# EAGLE board od-aws (EAGLE 9.6.2)
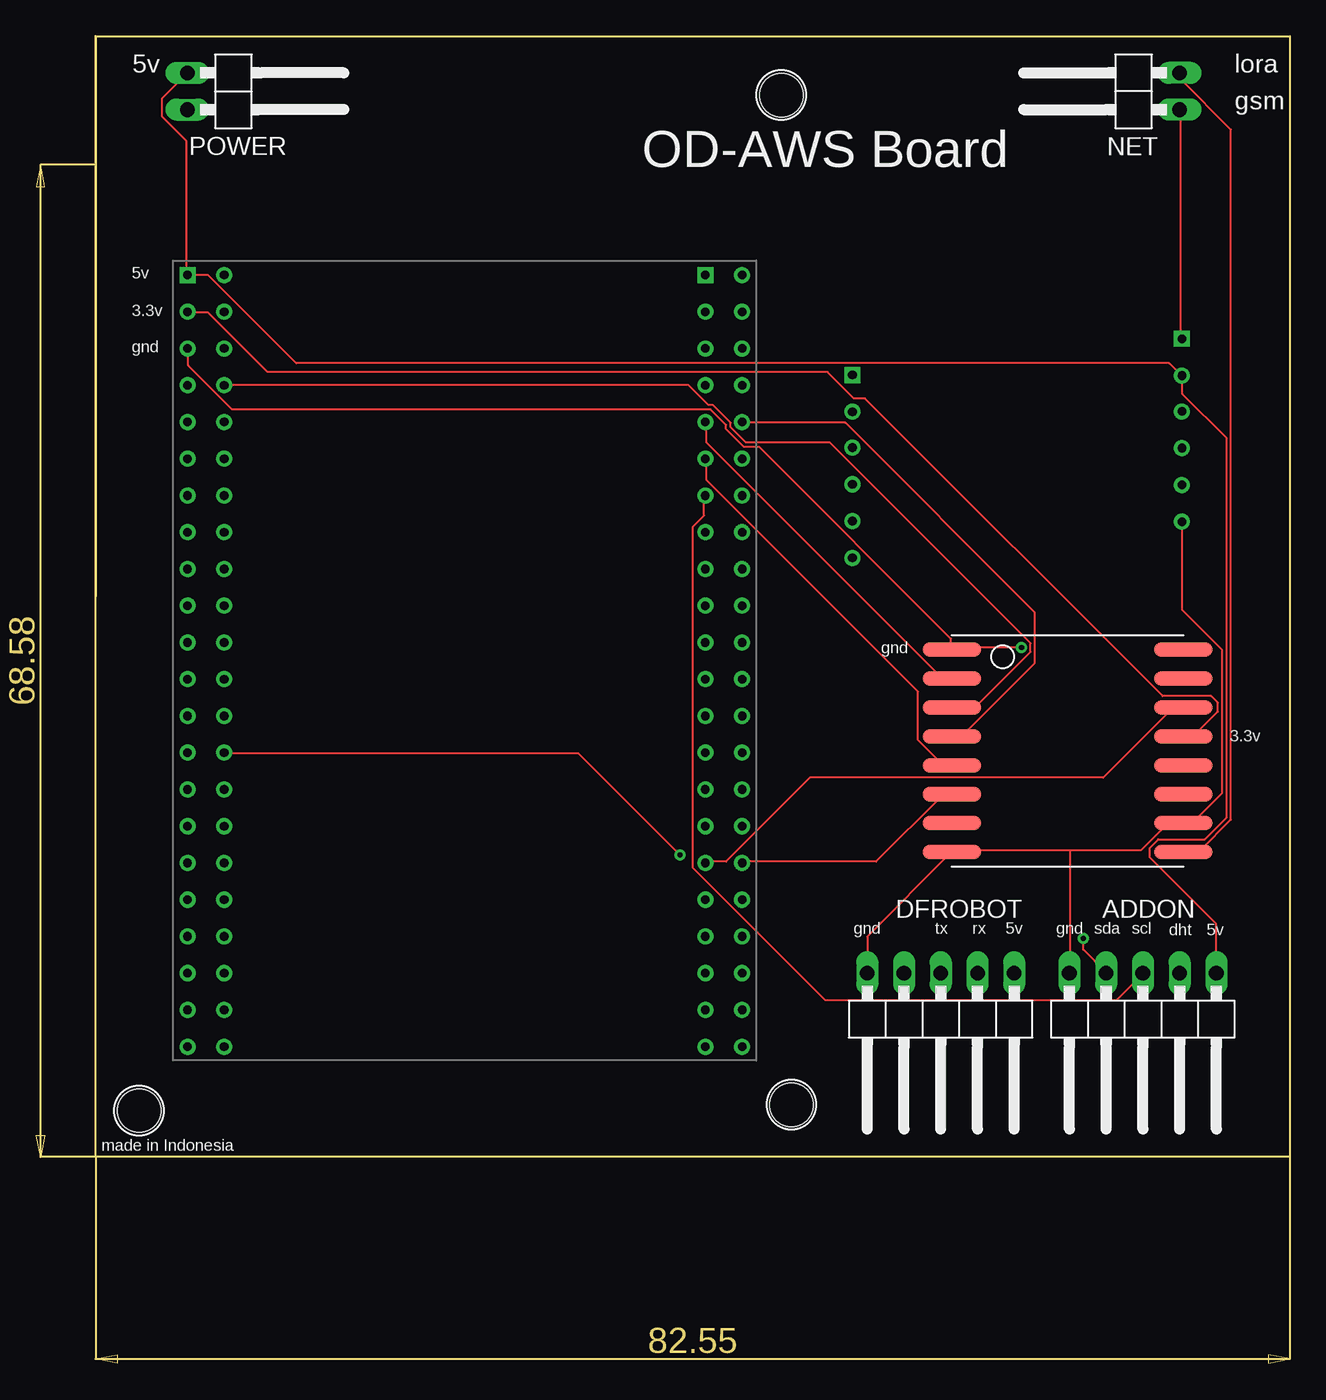
[diagram p0: board, top side]
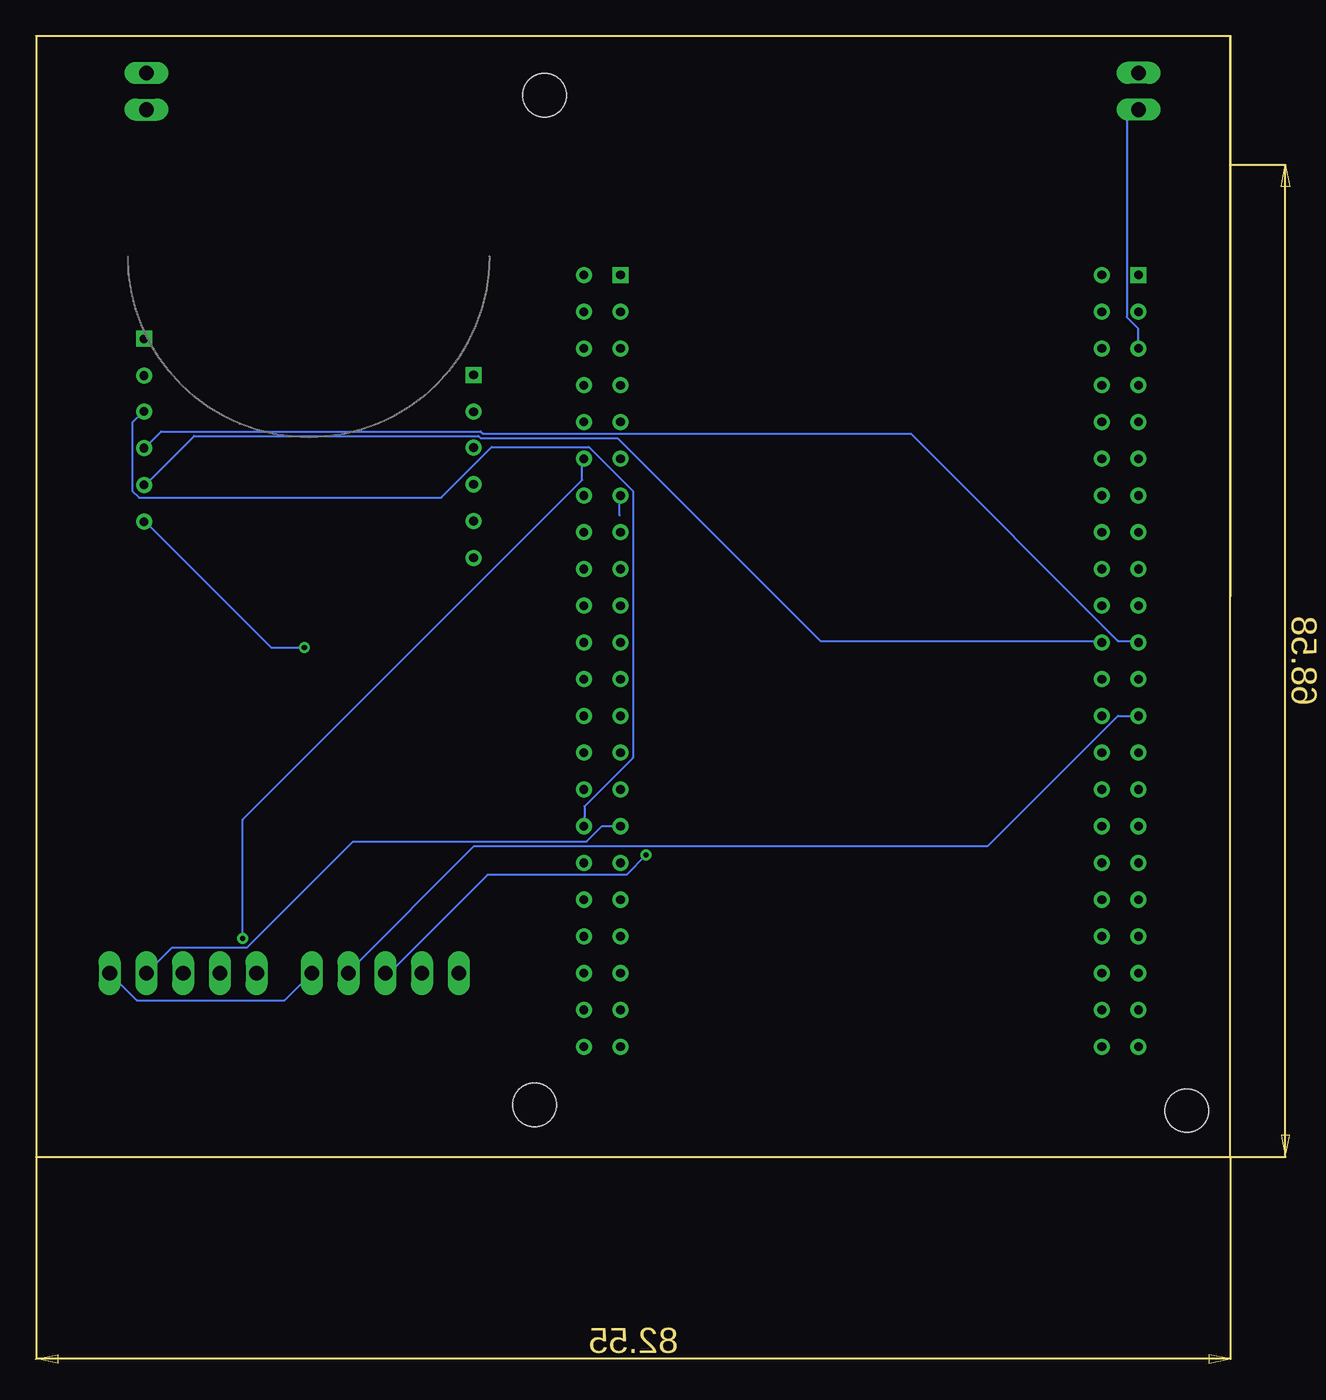
[diagram p1: board, bottom side, seen from below]

Size 82.55 x 77.47 mm. Coordinates in mm from the lower left corner, seen from the top.
Outline: 0,77.47 82.55,77.47 82.55,0 0,0 0,77.47
Copper layers (1*16): Top 0.035mm / dielectric 1.5mm / Bottom 0.035mm
Design rules "default": minimum track width 6mil, minimum drill 0.35mm, track to track 6mil, track to pad 6mil, pad to pad 6mil, via to via 6mil, smd to smd 6mil, copper to edge 40mil, drill to drill 6mil, minimum pad ring 10mil, minimum via ring 8mil, stop-mask expansion 4mil, vias tented up to drill 0mil, thermal gap 10mil
Holes 3 mm at 3,3.2 48.1,3.6 47.4,73.4

## Footprints (pad centres in the part's own frame; a part is rotated, then mirrored left to right if it is on the bottom)
1X05/90 = drill 1.016 long: 1 -5.08,-3.81; 2 -2.54,-3.81; 3 0,-3.81; 4 2.54,-3.81; 5 5.08,-3.81
1X02/90 = drill 1.016 long: 1 -1.27,-3.81; 2 1.27,-3.81
STM32F407VGT6 = drill 0.6: 3V31 0,-2.54; 3V32 2.54,-2.54; 3V34 38.34,0; 5V2 2.54,0; GND1 0,-5.08; GND2 2.54,-5.08; GND3 35.8,-2.54; GND4 38.34,-2.54; GND5 35.8,-5.08; GND7 38.34,-5.08; PA0 38.34,-40.64; PA1 35.8,-40.64; PA2 38.34,-38.1; PA3 35.8,-38.1; PA4 38.34,-35.56; PA5 35.8,-35.56; PA6 38.34,-33.02; PA7 35.8,-33.02; PA8 0,-22.86; PA9 0,-25.4; PA10 2.54,-25.4; PA11 2.54,-27.94; PA12 0,-27.94; PA15 2.54,-30.48; PB0 38.34,-27.94; PB1 35.8,-27.94; PB3 2.54,-45.72; PB5 0,-45.72; PB6 2.54,-48.26; PB7 0,-48.26; PB8 2.54,-50.8; PB9 0,-50.8; PB10 35.8,-15.24; PB11 38.34,-12.7; PB12 35.8,-12.7; PB13 38.34,-10.16; PB14 35.8,-10.16; PB15 2.54,-7.62; PC0 38.34,-45.72; PC1 35.8,-45.72; PC2 38.34,-43.18; PC3 35.8,-43.18; PC4 38.34,-30.48; PC5 35.8,-30.48; PC6 0,-17.78; PC7 2.54,-20.32; PC8 0,-20.32; PC9 2.54,-22.86; PC10 0,-30.48; PC11 2.54,-33.02; PC12 0,-33.02; PC13 35.8,-48.26; PD0 2.54,-35.56; PD1 0,-35.56; PD2 2.54,-38.1; PD3 0,-38.1; PD4 2.54,-40.64; PD5 0,-40.64; PD6 2.54,-43.18; PD7 0,-43.18; PD8 0,-7.62; PD9 2.54,-10.16; PD10 0,-10.16; PD11 2.54,-12.7; PD12 0,-12.7; PD13 2.54,-15.24; PD14 0,-15.24; PD15 2.54,-17.78; PE0 2.54,-53.34; PE1 0,-53.34; PE2 38.34,-53.34; PE3 35.8,-53.34; PE4 38.34,-50.8; PE5 35.8,-50.8; PE6 38.34,-48.26; PE7 38.34,-25.4; PE8 35.8,-25.4; PE9 38.34,-22.86; PE10 35.8,-22.86; PE11 38.34,-20.32; PE12 35.8,-20.32; PE13 38.34,-17.78; PE14 35.8,-17.78; PE15 38.34,-15.24; VDDA 35.8,-7.62; VREF+ 38.34,-7.62 | drill 0.6 square: 3V33 35.8,0; 5V1 0,0
SIM800L-V1 = drill 0.6: DTR 23.88,-10.72; GND 1.11,-18.32; MIC+ 23.88,-13.2; MIC- 23.88,-15.74; RST 1.11,-10.7; RX 1.11,-13.24; SPK+ 23.88,-18.28; SPK- 23.88,-20.82; TX 1.11,-15.78; VCC 1.11,-8.22 | drill 0.6 square: NET 1.11,-5.68; RING 23.88,-8.18
HOPERF_RFM95W = smd 4.064 x 1.016: 1 -8.12,7.13; 2 -8.12,5.13; 3 -8.12,3.13; 4 -8.12,1.13; 5 -8.12,-0.87; 6 -8.12,-2.87; 7 -8.12,-4.87; 8 -8.12,-6.87; 9 7.88,-6.87; 10 7.88,-4.87; 11 7.88,-2.87; 12 7.88,-0.87; 13 7.88,1.13; 14 7.88,3.13; 15 7.88,5.13; 16 7.88,7.13

## Placement (x,y rotation side)
ADDON  [1X05/90]  72.39,8.89 180 top
DFROBOT  [1X05/90]  58.42,8.89 180 top
NET  [1X02/90]  71.12,73.66 90 top
POWER  [1X02/90]  10.16,73.66 270 top
U$1  STM32F407VGT6  [STM32F407VGT6]  6.35,60.96 0 top
U$2  [SIM800L-V1]  76.2,62.23 0 bottom
U$3  HOPERF_RFM95W  [HOPERF_RFM95W]  67.31,27.94 0 top

## Library data of the parts
ADDON DFROBOT NET POWER = pinhead
U$1 = stm32f407vgt6
U$2 = sim800l-v1
U$3 = lora-lorawan-modules; HEIGHT: 1.8; LENGTH: 16; WIDTH: 16

## Nets
+3V3: U$1.3V31 U$3.13
+5V: ADDON.1 DFROBOT.1 POWER.1 U$1.5V1 U$2.VCC
ADDSCL: ADDON.3 U$1.PB10
ADDSDA: ADDON.4 U$1.PB11
DFRX: DFROBOT.2 U$1.PC10
DFTX: DFROBOT.3 U$1.PC11
DHT: ADDON.2 U$1.PA3
DI0: U$1.PA1 U$3.14
LORANET: NET.2 U$3.9
MISO: U$1.PB14 U$3.2
MOSI: U$1.PB15 U$3.3
NSS: U$1.PB12 U$3.5
PE: ADDON.5 DFROBOT.5 POWER.2 U$1.GND1 U$2.GND U$3.1 U$3.8 U$3.10
RST: U$1.PA0 U$3.6
SCK: U$1.PB13 U$3.4
SIMNET: NET.1 U$2.NET
SIMRST: U$1.PA2 U$2.RST
SIMRX: U$1.PA9 U$2.RX
SIMTX: U$1.PA10 U$2.TX

## Tracks (layer width: path | path; a pad name or v marks a point on that pad's centre or on a via)
+3V3
  Top 0.152: U$1.3V31 6.4,58.37 7.77,58.37 11.89,54.25 50.6,54.25 52.43,52.43 53.19,52.43 73.76,31.85 77.11,31.85 77.57,31.39 77.57,30.79 75.89,29.11 75.29,29.11 U$3.13
+5V
  Top 0.152: POWER.1 4.57,73.15 4.57,71.93 6.25,70.26 6.25,60.96 U$1.5V1 7.77,60.96 13.87,54.86 74.22,54.86 74.98,54.1 U$2.VCC 75.13,53.95 75.13,52.73 78.18,49.68 78.18,23.47 76.66,21.95 73.46,21.95 72.85,21.34 72.85,20.73 77.42,16.15 77.42,12.8 ADDON.1
  Bottom 0.152: DFROBOT.1 65.38,10.82 75.59,10.82 ADDON.1
ADDSCL
  Top 0.152: U$1.PB10 42.06,45.72 42.06,44.35 41.3,43.59 41.3,19.96 50.44,10.82 70.56,10.82 72.39,12.65 ADDON.3
  Bottom 0.152: 42.22,44.35 42.22,45.72 U$1.PB10
ADDSDA  (via drill 0.35)
  Top 0.152: v68.28,15.09 68.28,14.33 69.8,12.8 ADDON.4
  Bottom 0.152: U$1.PB11 44.81,48.16 44.81,46.79 68.28,23.32 v68.28,15.09
DFRX
  Bottom 0.152: U$1.PC10 7.77,30.48 16.76,21.49 52.27,21.49 60.96,12.8 DFROBOT.2
DFTX  (via drill 0.35)
  Top 0.152: U$1.PC11 8.99,27.89 33.38,27.89 v40.39,20.88
  Bottom 0.152: v40.39,20.88 41.76,19.51 51.36,19.51 58.06,12.8 58.37,12.8 DFROBOT.3
DHT
  Bottom 0.152: U$1.PA3 43.43,22.86 44.5,21.79 60.66,21.79 67.97,14.48 73.15,14.48 ADDON.2
DI0
  Top 0.152: U$1.PA1 42.22,20.42 43.59,20.42 49.38,26.21 69.65,26.21 74.37,30.94 75.13,30.94 U$3.14
LORANET
  Top 0.152: NET.2 74.98,74.83 74.98,74.52 78.49,71.02 78.49,23.32 76.35,21.18 75.29,21.18 U$3.9
MISO
  Top 0.152: U$1.PB14 42.22,50.75 42.22,49.38 58.52,33.07 59.13,33.07 U$3.2
MOSI
  Top 0.152: U$1.PB15 41,53.34 42.37,51.97 42.67,51.97 43.89,50.75 43.89,50.44 44.96,49.38 50.75,49.38 64.62,35.51 64.62,34.9 60.81,31.09 59.28,31.09 U$3.3
NSS
  Top 0.152: U$1.PB12 42.22,48.16 42.22,46.79 56.84,32.16 56.84,28.8 58.52,27.13 59.13,27.13 U$3.5
PE  (via drill 0.35)
  Top 0.152: U$2.GND 75.13,43.89 75.13,37.8 77.88,35.05 77.88,25.15 75.89,23.16 75.29,23.16 U$3.10 75.13,23.01 74.07,23.01 72.24,21.18 67.36,21.18 | 67.36,21.18 59.28,21.18 U$3.8 59.13,21.03 53.34,15.24 DFROBOT.5 | v64.01,35.2 59.28,35.2 U$3.1 59.13,35.2 59.13,35.81 45.87,49.07 44.81,49.07 43.59,50.29 43.59,50.6 42.52,51.66 9.45,51.66 6.4,54.71 6.4,55.78 U$1.GND1 | 67.36,21.18 67.36,12.8 ADDON.5
  Bottom 0.152: U$1.GND1 6.4,55.93 6.4,57.3 7.16,58.06 7.16,71.63 6.4,72.39 POWER.2 | v64.01,35.2 66.29,35.2 74.98,43.89 U$2.GND
RST
  Top 0.152: U$1.PA0 44.81,20.42 53.95,20.42 58.52,24.99 59.13,24.99 U$3.6
SCK
  Top 0.152: U$1.PB13 44.81,50.75 51.82,50.75 64.92,37.64 64.92,34.14 59.89,29.11 59.28,29.11 U$3.4
SIMNET
  Top 0.152: U$2.NET 74.98,56.69 74.98,72.39 NET.1
SIMRST
  Bottom 0.152: U$1.PA2 44.65,22.86 44.65,24.23 41.3,27.58 41.3,46.02 44.35,49.07 51.05,49.07 54.56,45.57 75.44,45.57 75.89,46.02 75.89,50.75 75.13,51.51 U$2.RST
SIMRX
  Bottom 0.152: U$1.PA9 6.4,35.66 7.77,35.66 22.1,49.99 51.66,49.99 51.82,50.14 73.91,50.14 74.98,49.07 U$2.RX
SIMTX
  Bottom 0.152: U$1.PA10 8.99,35.66 28.35,35.66 42.37,49.68 51.82,49.68 51.97,49.84 71.63,49.84 74.98,46.48 U$2.TX

## Text on the board
tNames: 5v | lora | gsm | OD-AWS Board | 5v | 3.3v | gnd | gnd | 3.3v | gnd | tx | rx | 5v | gnd | sda | scl | dht | 5v | made in Indonesia